# EAGLE board pdu_souvenir (EAGLE 9.6.2)
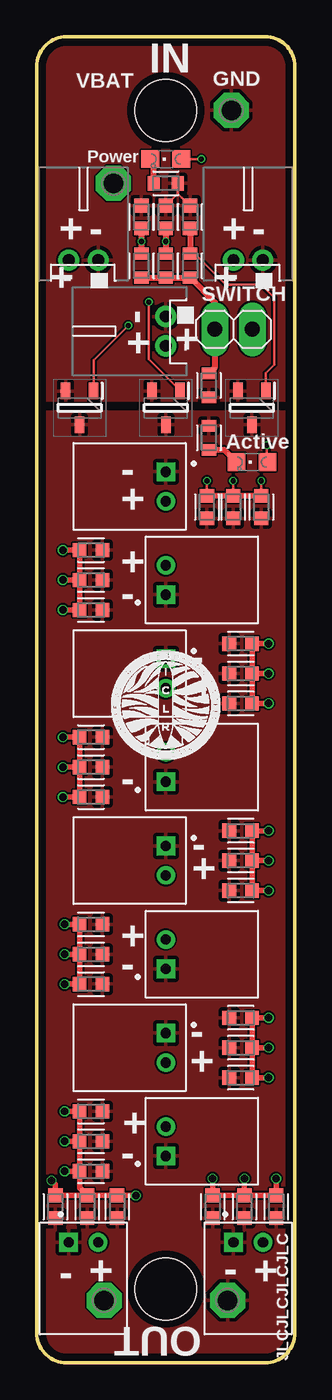
[diagram p0: board, top side]
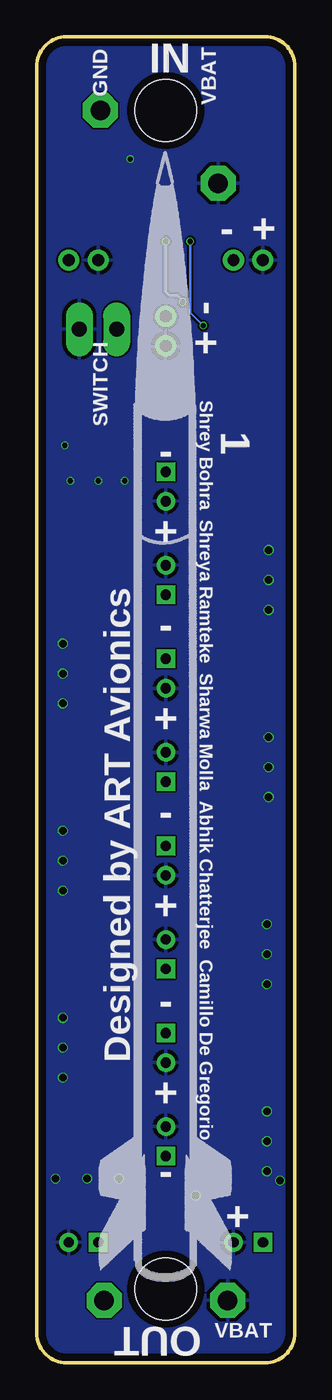
[diagram p1: board, bottom side, seen from below]

Size 17.5 x 90 mm. Coordinates in mm from the lower left corner, seen from the top.
Outline: 15.5,0 2,0 arc-90 0,2 0,88 arc-90 2,90 15.5,90 arc-90 17.5,88 17.5,2 arc-90 15.5,0
Copper layers (1*16): Top 0.035mm / dielectric 1.6mm / Bottom 0.035mm
Design rules "jlcpcb-2layers *": minimum track width 5mil, minimum drill 0.3mm, track to track 5mil, track to pad 5mil, pad to pad 5mil, via to via 5mil, smd to smd 5mil, copper to edge 0.5mm, drill to drill 6mil, minimum pad ring 10mil, minimum via ring 3mil, stop-mask expansion 4mil, vias tented up to drill 1mm, thermal gap 10mil
Holes 4.2 mm at 8.75,85 8.75,5

## Footprints (pad centres in the part's own frame; a part is rotated, then mirrored left to right if it is on the bottom)
CAPC1608X85 = smd 0.921 x 0.97: 1 -0.775,0; 2 0.775,0
JST-PH-2-THM-RA = drill 0.8 pad 1.422: 1 1,0; 2 -1,0
SOT95P251X112-3N = smd 1.1 x 0.65: 1 -1.15,0.95; 2 -1.15,-0.95; 3 1.15,0
S2B-PH-K-S(LF)(SN) = drill 0.7 square: 1 -1,0 | drill 0.7: 2 1,0
1X02 = drill 1.016 long: 1 -1.27,0; 2 1.27,0
CHIPLED_0805 = smd 1.2 x 1.2: A 0,-1.05; C 0,1.05
RESC1608X60 = smd 0.799 x 0.974: 1 -0.815,0; 2 0.815,0
P1-13 = drill 1.321 pad 2.159 octagon: TP 0,0

## Placement (x,y rotation side)
C1  100p  [CAPC1608X85]  7.1,77.77 270 top
C2  100p  [CAPC1608X85]  8.75,77.77 270 top
C3  100p  [CAPC1608X85]  10.4,77.77 270 top
C4  100n  [CAPC1608X85]  1.26,10.58 90 top
C5  1u  [CAPC1608X85]  3.42,10.58 90 top
C6  22u  [CAPC1608X85]  5.45,10.58 90 top
C7  100n  [CAPC1608X85]  11.93,10.58 90 top
C8  1u  [CAPC1608X85]  14.08,10.58 90 top
C9  22u  [CAPC1608X85]  16.24,10.58 90 top
C10  100n  [CAPC1608X85]  3.67,17.06 180 top
C11  1u  [CAPC1608X85]  3.67,25.7 180 top
C12  22u  [CAPC1608X85]  3.67,15.03 180 top
C13  100n  [CAPC1608X85]  3.67,29.76 180 top
C14  1u  [CAPC1608X85]  3.67,13 180 top
C15  22u  [CAPC1608X85]  3.67,27.73 180 top
C16  100n  [CAPC1608X85]  3.67,42.46 180 top
C17  1u  [CAPC1608X85]  3.67,38.4 180 top
C18  22u  [CAPC1608X85]  3.67,40.43 180 top
C19  100n  [CAPC1608X85]  3.67,55.16 180 top
C20  1u  [CAPC1608X85]  3.67,51.1 180 top
C21  22u  [CAPC1608X85]  3.67,53.13 180 top
C22  100n  [CAPC1608X85]  13.83,36.11 0 top
C23  1u  [CAPC1608X85]  13.83,19.35 0 top
C24  22u  [CAPC1608X85]  13.83,21.38 0 top
C25  100n  [CAPC1608X85]  13.83,23.41 0 top
C26  1u  [CAPC1608X85]  11.54,58.08 90 top
C27  22u  [CAPC1608X85]  13.83,34.08 0 top
C28  100n  [CAPC1608X85]  13.83,48.81 0 top
C29  1u  [CAPC1608X85]  13.83,44.75 0 top
C30  22u  [CAPC1608X85]  13.83,46.78 0 top
C31  100n  [CAPC1608X85]  15.23,58.08 90 top
C32  1u  [CAPC1608X85]  13.83,32.05 0 top
C33  22u  [CAPC1608X85]  13.32,58.08 90 top
CN1  [JST-PH-2-THM-RA]  8.75,70.02 90 top
CN2  [JST-PH-2-THM-RA]  14.34,74.84 0 top
CN3  [JST-PH-2-THM-RA]  3.16,74.84 0 top
IC1  FDN359BN  [SOT95P251X112-3N]  2.91,64.81 270 top
IC2  FDN359BN  [SOT95P251X112-3N]  8.75,64.81 270 top
IC3  FDN359BN  [SOT95P251X112-3N]  14.59,64.81 270 top
J1  S2B-PH-K-S(LF)(SN)  [S2B-PH-K-S(LF)(SN)]  14.34,8.17 0 top
J2  S2B-PH-K-S(LF)(SN)  [S2B-PH-K-S(LF)(SN)]  3.16,8.17 0 top
J3  S2B-PH-K-S(LF)(SN)  [S2B-PH-K-S(LF)(SN)]  8.75,59.48 270 top
J4  S2B-PH-K-S(LF)(SN)  [S2B-PH-K-S(LF)(SN)]  8.75,53.13 90 top
J5  S2B-PH-K-S(LF)(SN)  [S2B-PH-K-S(LF)(SN)]  8.75,46.78 270 top
J6  S2B-PH-K-S(LF)(SN)  [S2B-PH-K-S(LF)(SN)]  8.75,40.43 90 top
J7  S2B-PH-K-S(LF)(SN)  [S2B-PH-K-S(LF)(SN)]  8.75,34.08 270 top
J8  S2B-PH-K-S(LF)(SN)  [S2B-PH-K-S(LF)(SN)]  8.75,27.73 90 top
J9  S2B-PH-K-S(LF)(SN)  [S2B-PH-K-S(LF)(SN)]  8.75,21.38 270 top
J10  S2B-PH-K-S(LF)(SN)  [S2B-PH-K-S(LF)(SN)]  8.75,15.03 90 top
JP1  PINHD-1X2  [1X02]  13.35,70.15 180 top
LED2  LEDY  [CHIPLED_0805]  14.59,61.13 90 top
LED3  LEDG  [CHIPLED_0805]  8.75,81.7 90 top
R1  470  [RESC1608X60]  7.1,74.46 270 top
R2  68k  [RESC1608X60]  11.67,66.34 90 top
R3  470  [RESC1608X60]  8.75,74.46 270 top
R4  120  [RESC1608X60]  11.67,62.78 90 top
R5  470  [RESC1608X60]  10.4,74.46 270 top
R6  100  [RESC1608X60]  8.75,80.05 180 top
TP1  PTR1PAD1-13  [P1-13]  12.94,4.23 0 top
TP2  PTR1PAD1-13  [P1-13]  4.56,4.23 0 top
TP3  PTR1PAD1-13  [P1-13]  13.2,85 0 top
TP4  PTR1PAD1-13  [P1-13]  5.19,80.05 0 top

## Library data of the parts
C1-C33 = Capacitor; CATEGORY: Capacitor
CN1-CN3 LED2 LED3 = adafruit
IC1-IC3 = SamacSys_Parts; ARROW_PART_NUMBER: FDN359BN; ARROW_PRICE-STOCK: https://www.arrow.com/en/products/fdn359bn/on-semiconductor?region=nac; DESCRIPTION: FDN359BN, N-channel MOSFET Transistor 2.7 A 30 V, 3-Pin SuperSOT; HEIGHT: 1.12mm; MANUFACTURER_NAME: onsemi; MANUFACTURER_PART_NUMBER: FDN359BN; MOUSER_PART_NUMBER: 512-FDN359BN; MOUSER_PRICE-STOCK: https://www.mouser.co.uk/ProductDetail/ON-Semiconductor-Fairchild/FDN359BN?qs=8YYpzd7qSxKZfze3Gm99uA%3D%3D
J1-J10 = Connectors; CREATED_BY: PCBLayout.com; DIGI_KEY_PART_NUMBER: 455-1719-ND; MANUFACTURER: JST Sales America Inc.; MPN: S2B-PH-K-S(LF)(SN)
JP1 = Connector; CATEGORY: Headers; DESCRIPTION: Header, Straight, 2 Position; MANUFACTURER: Generic; MPN: Generic; OPERATING_TEMPERATURE: Generic; PART_STATUS: Active; PITCH: 0.100" (2.54mm); ROHS_COMPLIANCE: Generic; SERIES: Generic; SUB-CATEGORY: Headers, Male Pins; TYPE: Board to Board or Cable, Unshrouded, Through Hole, Straight
R1-R6 = Resistor; CATEGORY: Resistor; SUB-CATEGORY: Fixed
TP1-TP4 = testpad

## Nets
EN: JP1.2 R1.2 R2.2 R3.2 R5.2
GND: C1.1 C2.1 C3.1 CN1.1 CN2.1 CN3.1 IC1.2 IC2.2 IC3.2 R2.1 R6.1 TP3.TP
N$1: C1.2 IC1.1 R1.1
N$2: C2.2 IC2.1 R3.1
N$3: C3.2 IC3.1 R5.1
N$4: LED3.C R6.2
N$5: LED2.C R4.1
RET: C4.1 C5.1 C6.1 C7.1 C8.1 C9.1 C10.1 C11.1 C12.1 C13.1 C14.1 C15.1 C16.1 C17.1 C18.1 C19.1 C20.1 C21.1 C22.1 C23.1 C24.1 C25.1 C26.1 C27.1 C28.1 C29.1 C30.1 C31.1 C32.1 C33.1 IC1.3 IC2.3 IC3.3 J1.1 J2.1 J3.1 J4.1 J5.1 J6.1 J7.1 J8.1 J9.1 J10.1 R4.2 TP1.TP
VBAT: C4.2 C5.2 C6.2 C7.2 C8.2 C9.2 C10.2 C11.2 C12.2 C13.2 C14.2 C15.2 C16.2 C17.2 C18.2 C19.2 C20.2 C21.2 C22.2 C23.2 C24.2 C25.2 C26.2 C27.2 C28.2 C29.2 C30.2 C31.2 C32.2 C33.2 CN1.2 CN2.2 CN3.2 J1.2 J2.2 J3.2 J4.2 J5.2 J6.2 J7.2 J8.2 J9.2 J10.2 JP1.1 LED2.A LED3.A TP2.TP TP4.TP

## Tracks (layer width: path | path; a pad name or v marks a point on that pad's centre or on a via)
EN
  Top 0.4: R1.2 R3.2 R5.2 12.08,71.97 JP1.2 12.08,67.56 R2.2
GND
  Top 0.178: C2.1 9.56,79.36 | 9.56,79.36 R6.1 | C3.1 10.38,78.54 9.82,79.1 9.56,79.36
  Top 0.381: 1.77,65.96 IC1.2
  pour Top: -2.68,91.99 20.18,91.99 20.18,65.32 -2.68,65.32
N$1  (via drill 0.35)
  Top 0.178: IC1.1 3.86,68.05 v6.21,70.4
  Top 0.254: 3.68,66.14 IC1.1 4.04,65.78
  Top 0.4: C1.2 v7.1,76.11 R1.1
  Bottom 0.178: v6.21,70.4 7.1,71.29 v7.1,76.11
N$2  (via drill 0.35)
  Top 0.178: IC2.1 9.7,66.02 7.61,68.11 v7.61,71.99 v7.6,72
  Top 0.254: 9.89,65.78 IC2.1
  Top 0.4: C2.2 v8.75,76.11 R3.1
  Bottom 0.178: v8.75,76.11 8.75,72.7 8.5,72.45 8,72.45 7.6,72.05 v7.6,72
N$3
  Top 0.178: IC3.1 15.54,67.16 16.12,67.73 16.12,72.31 15.23,73.19 12.81,73.19 10.73,75.28 R5.1
  Top 0.254: IC3.1 15.37,66.01
  Top 0.4: C3.2 R5.1
N$4
  Top 0.4: R6.2 7.94,81.47 LED3.C
N$5
  Top 0.4: R4.1 12.71,61.97 LED2.C
RET
  pour Top: -2.68,64.56 20.18,64.56 20.18,-3.26 -2.68,-3.26
VBAT  (via drill 0.35, 0.51)
  Top 0.178: C26.2 v11.54,59.86 | 13.2,58.98 C33.2 v13.32,59.86 | C31.2 v15.23,59.86 | LED2.A 15.61,61.16 v15.61,62.27 | LED3.A v11.16,81.7
  Top 0.381: C21.2 C19.2 v1.76,55.16 | C21.2 C20.2 v1.76,51.1 | C18.2 C16.2 v1.76,42.46 | C18.2 C17.2 v1.76,38.4 | C30.2 C28.2 v15.73,48.81 | C30.2 C29.2 v15.73,44.75 | C27.2 C22.2 v15.73,36.11 | C27.2 C32.2 v15.73,32.05 | C15.2 C13.2 v1.89,29.76 | C15.2 C11.2 v1.89,25.7 | C24.2 C23.2 v15.73,19.35 | C24.2 C25.2 v15.73,23.41 | C14.2 C12.2 | C12.2 C10.2 v1.89,17.06 | C8.2 C7.2 v11.93,12.49 | C8.2 C9.2 v16.24,12.49 | C5.2 C6.2 6.71,11.36 v6.72,11.34 | C5.2 C4.2 1.26,12.11 v1,12.36 | C5.2 2.89,11.88 C14.2 | C24.2 v15.73,21.38 | C14.2 v1.89,13 | C12.2 v1.89,15.03 | v14.08,12.49 C8.2 | C15.2 v1.89,27.73 | C27.2 v15.73,34.08 | C18.2 v1.76,40.43 | C30.2 v15.73,46.78 | C21.2 v1.76,53.13
  Top 0.4: C26.2 C33.2 C31.2
  pour Bottom: -1.41,90.72 18.91,90.72 18.91,-1.99 -1.41,-1.99

## Text on the board
tPlace: IN | VBAT | GND | Power | + | - | + | - | + | + | SWITCH | - | + | + | Active | - | + | + | - | - | + | - | - | + | + | - | - | + | + | - | JLCJLCJLCJLC | - | + | + | - | + | OUT
bPlace: VBAT | GND | IN | + | - | - | + | Shrey Bohra Shreya Ramteke Sharwa Molla Abhik Chatterjee Camillo De Gregorio | SWITCH | 1 | - | + | Designed by ART Avionics | - | + | - | + | - | + | - | + | VBAT | OUT
bStop: 0 | 0.05 | 85 | 0.1 | 0.2 | 0.3 | 80 | 0.4 | 75 | 0.5 | + | 70 | 65 | 60 | 55 | 1.5 | 50 | 45 | 40 | 2 | 35 | 30 | 25 | 2.5 | 20 | 15 | 3 | 10 | 5 | 4 | 3 | 2 | 1 | 0